# Altium PCB PCB1.PcbDoc
Units mil, origin at the board's own origin, x right, y up, seen from the top; angles counter-clockwise.
Board outline 6000 x 4000 mil, 2 copper layers (Top Layer, Bottom Layer); 20 components, 15 nets, 62 pads, 0 vias.
Unrouted connection lines stored in the file: 43.
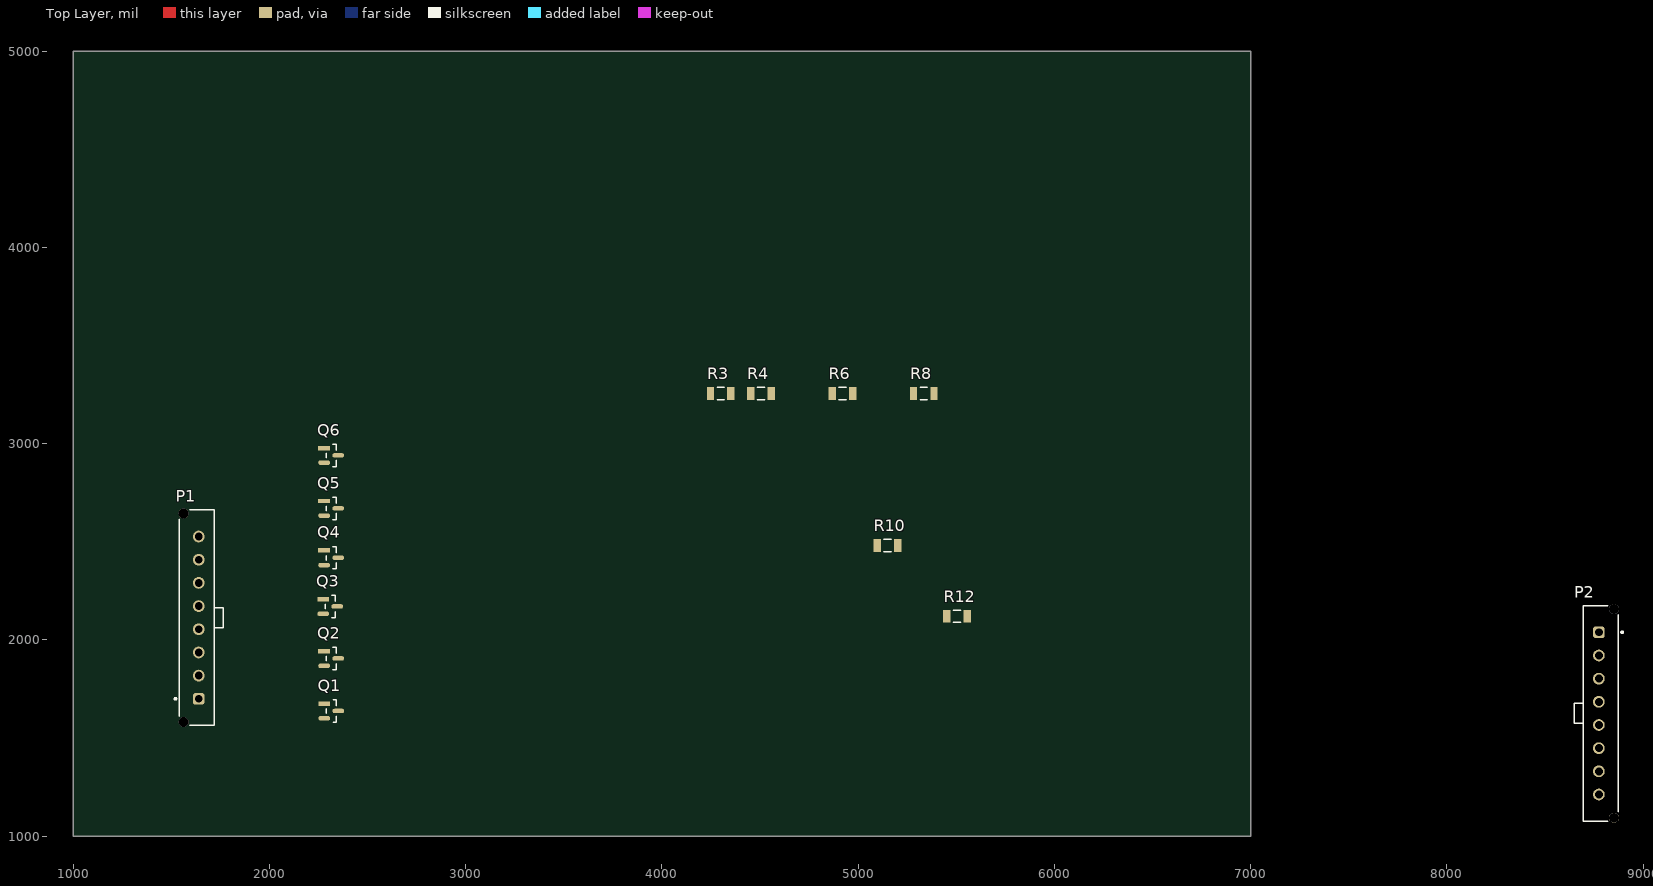
[diagram p0: Top Layer view]
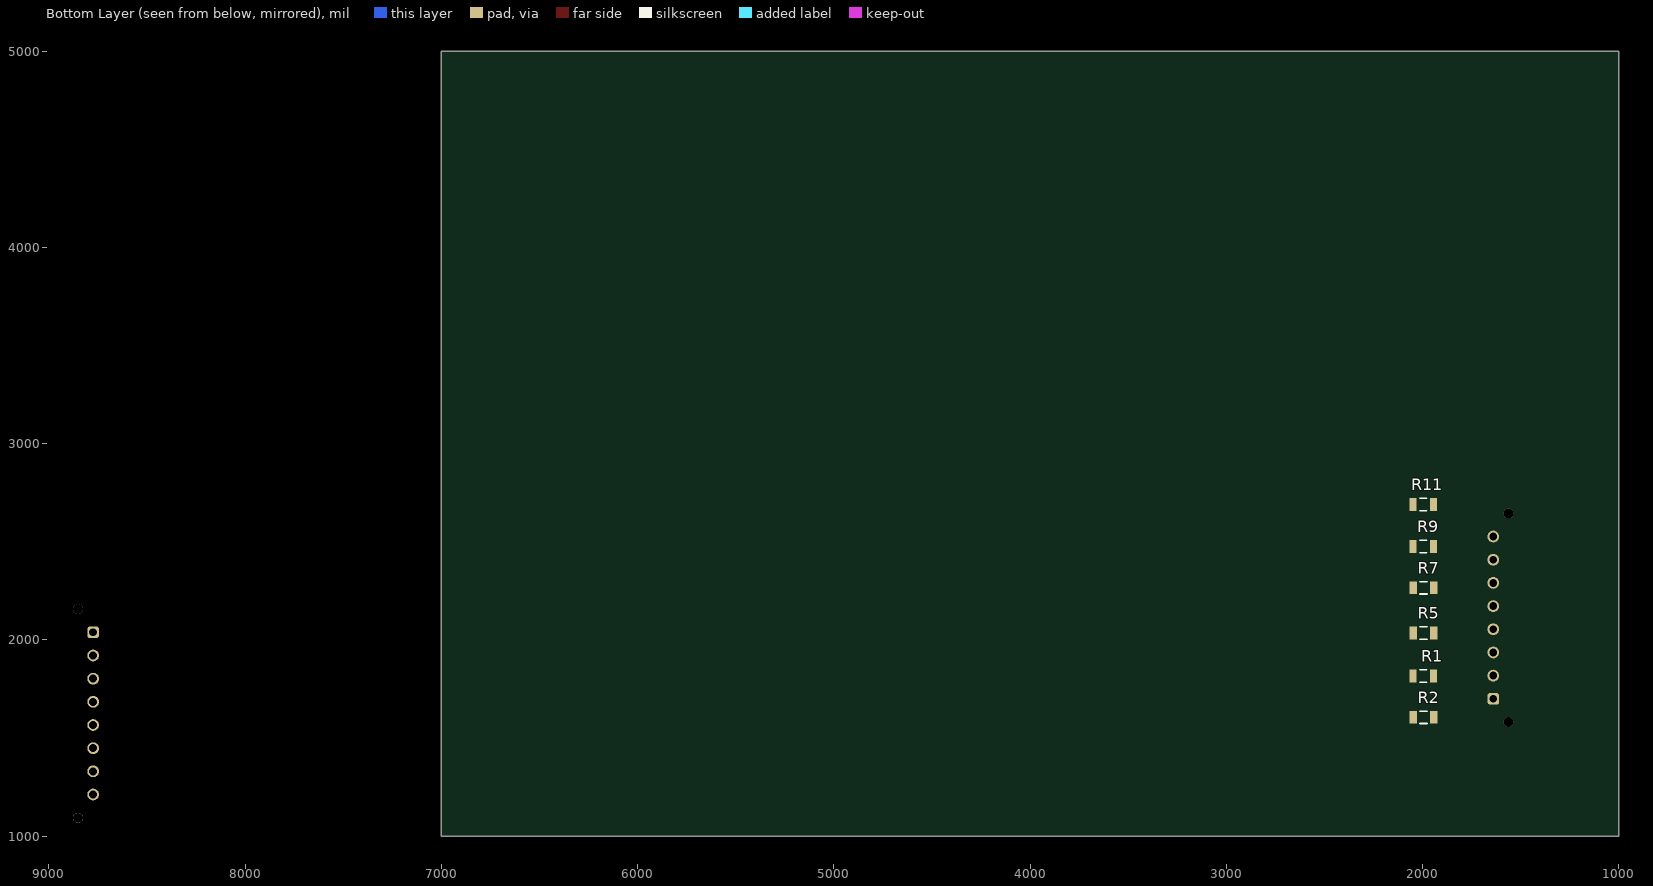
[diagram p1: Bottom Layer view, seen from below]

## Layer stack, top to bottom
Top Solder: solder mask 0.4, Solder Resist, Dk 3.5
Top Layer: signal copper 1.4
Dielectric 1: dielectric 12.6, FR-4, Dk 4.8
Bottom Layer: signal copper 1.4
Bottom Solder: solder mask 0.4, Solder Resist, Dk 3.5

## Board outline
1000,1000 7000,1000 7000,5000 1000,5000

## Design rules (kind name [scope] priority, off if disabled: settings)
Clearance [All] p1: gap=10 ignorepadtopadclearanceinfootprint=FALSE except(0: Arc-Hole Track-Hole SMDPad-Hole THPad-Hole Via-Hole Fill-Hole Poly-Hole Region-Hole Text-Hole)
PolygonConnect [All] p1: connectstyle=Relief reliefconductorwidth=10 reliefentries=4 polygonreliefangle="90 Angle" airgapwidth=10
RoutingVias [All] p1: holewidth=28 width=50 viastyle="Through Hole" minholewidth=28 minwidth=50 maxholewidth=28 maxwidth=50
SolderMaskExpansion [All] p1: expansion=4 istentingtop=FALSE
Width [All] p1: maxlimit=10 minlimit=10 preferedwidth=10
30 further rules are at their usual default settings.

## Components (designator, comment, footprint, x,y, rotation, side; value= is the part's Value field where it differs from the comment)
P1 "LOW_VOLTAGE" 66200811122 1629.96,2112.84 r270 top
P2 "HIGH_VOLTAGE" 66200811122 8785,1625 r90 top
Q1 "BSS138" FP-318-08-IPC_B 2315.83,1637.4 r0 top
Q2 "BSS138" FP-318-08-IPC_B 2315,1905 r0 top
Q3 "BSS138" FP-318-08-IPC_B 2310,2170 r0 top
Q4 "BSS138" FP-318-08-IPC_B 2315,2418.11 r0 top
Q5 "BSS138" FP-318-08-IPC_B 2315,2670 r0 top
Q6 "BSS138" FP-318-08-IPC_B 2315,2940 r0 top
R1 "CRCW120610K0FKEA" FP-CRCW1206-e3-IPC_C 1997.21,1815 r180 bottom
R2 "CRCW120610K0FKEA" FP-CRCW1206-e3-IPC_C 1995,1605 r180 bottom
R3 "CRCW120610K0FKEA" FP-CRCW1206-e3-IPC_C 4300,3255 r0 top
R4 "CRCW120610K0FKEA" FP-CRCW1206-e3-IPC_C 4505,3255 r0 top
R5 "CRCW120610K0FKEA" FP-CRCW1206-e3-IPC_C 1995,2035 r180 bottom
R6 "CRCW120610K0FKEA" FP-CRCW1206-e3-IPC_C 4920,3255 r0 top
R7 "CRCW120610K0FKEA" FP-CRCW1206-e3-IPC_C 1995,2265 r180 bottom
R8 "CRCW120610K0FKEA" FP-CRCW1206-e3-IPC_C 5335,3255 r0 top
R9 "CRCW120610K0FKEA" FP-CRCW1206-e3-IPC_C 1997.21,2475 r180 bottom
R10 "CRCW120610K0FKEA" FP-CRCW1206-e3-IPC_C 5150,2480 r0 top
R11 "CRCW120610K0FKEA" FP-CRCW1206-e3-IPC_C 1997.21,2690 r180 bottom
R12 "CRCW120610K0FKEA" FP-CRCW1206-e3-IPC_C 5505,2120 r0 top

## Footprints (in the part's own frame and the unit in brackets; to place one, negate y for a bottom-side part, rotate by r counter-clockwise, add the part's x,y. Pads: shape width x height; smd on the part's side, far side on the other; paste and mask are expansions set on the pad)
66200811122 [mm] "3.00mm Male Single Row Vertical Header, 8p"
  rrect50% 1.52x1.52 hole 1.02: 1(10.5,0.255)
  round 1.52 hole 1.02: 2(7.5,0.255) 3(4.5,0.255) 4(1.5,0.255) 5(-1.5,0.255) 6(-4.5,0.255) 7(-7.5,0.255) 8(-10.5,0.255)
  round 1.27 hole 1.27 unplated: MH1(-13.5,-1.705) MH2(13.5,-1.705)
  silkscreen extent -13.95,-2.87 13.95,3.46, body extent -13.82,-2.19 13.83,3.38, height 9.93
FP-318-08-IPC_B [mm]
  rect 1.524x0.578 smd paste+0 mask+0: 1(-0.91,0.95)
  rrect100% 1.524x0.578 smd paste+0 mask+0: 2(-0.91,-0.95) 3(0.91,0)
  silkscreen extent -0.65,-1.45 0.65,1.45, body extent -1.92,-1.7 1.92,1.7, height 0.25
FP-CRCW1206-e3-IPC_C [mil]
  rect 37.64x65.28 smd paste+0 mask+0: 1(-52.21,0) 2(52.21,0)
  silkscreen extent -19,-31 19,31, body extent -63,-31 63,31, height 24

## Part data
P1 P2: library part CMP-1502-00446-2, Color=Black, Contact Resistance=10mΩ, Current Rating=5A, Insulation Resistance=1GΩ, Max Operating Temperature=105°C, Min Operating Temperature=-40°C, Operating Supply Voltage=250V, Connector Type="Male Pin, Socket", Contact Material=Copper, Contact Plating=Tin, Fastening Type=Ramp, Gender=Male, Height=11mm, Lead Pitch=3mm, Length=27.65mm, Mount="Through Hole", NexarPartId=23024701, Number of Contacts=8, Number of Pins=8, Number of Positions=8, Number of Rows=1, Orientation=Vertical, Pitch=3mm, REACH SVHC=Unknown, RoHS=Compliant, Termination="Kinked Pin", Width=27.65mm
Q1 Q2 Q3 Q4 Q5 Q6: library part CMP-07173-000101-1, "MOSFET N-CH 50V 220MA SOT-23", Case/Package=SOT-23, Continuous Drain Current (ID)=220mA, Drain to Source Breakdown Voltage=50V, Drain to Source Resistance=3.5R, Gate to Source Voltage (Vgs)=20V, Input Capacitance=27pF, Max Operating Temperature=150°C, Max Power Dissipation=360mW, Min Operating Temperature=-55°C, On-State Resistance=6R, Package Quantity=1, Threshold Voltage=1.3V, Contact Plating=Tin, Current Rating=220mA, Drain to Source Voltage (Vdss)=50V, Dual Supply Voltage=50V, Element Configuration=Single, Fall Time=9ns, Height=0.93mm, Lead Free="Lead Free", Length=2.92mm, Mount="Surface Mount", Nominal Vgs=1.3V, Number of Elements=1, Number of Pins=3, Packaging="Tape and Reel", Power Dissipation=360mW, Radiation Hardening=No, Rds On Max=3.5R, REACH SVHC="No SVHC", Rise Time=9ns, Termination=SMD/SMT, Turn-Off Delay Time=20ns, Turn-On Delay Time=2.5ns, Voltage Rating (DC)=50V, Weight=0.03g, Width=1.3mm
R1 R2 R3 R4 R5 R6 R7 R8 R9 R10 R11 R12: library part CMP-2003-04807-2, "RES Thick Film, 10kΩ, 1%, 0.25W, 100ppm/°C, 1206", Case Code (Imperial)=1206, Case Code (Metric)=3216, Max Operating Temperature=155°C, Max Power Dissipation=250mW, Min Operating Temperature=-55°C, Package Quantity=10, Resistance=10kR, Temperature Coefficient=100ppm/°C, Tolerance=1%, Voltage Rating=200V, Case/Package=1206, Composition="Thick Film", Contact Plating=Tin, Depth=1.6mm, Features="Automotive AEC-Q200", Height=0.55mm, Lead Free="Lead Free", Length=3.2mm, Military Standard=Not, Number of Pins=2, Number of Terminations=2, Packaging="Tape and Reel", Power Rating=250mW, Radiation Hardening=No, Termination=SMD/SMT, Voltage Rating (DC)=200V, Weight=0.000353oz, Width=0.063inch, Working Voltage=200V

## Nets (pads, with @x,y where several pads share a name; then routed paths per layer and width w, separated by ;. In a path a pad name is that pad's centre, name@x,y a point inside that pad or via, vN(x,y) a via of type N, cw(c..) or ccw(c..) an arc to the next point about the centre after c; other vN are vias at no path point)
GND: P1.3 P2.3
HV: P2.4 R3.2 R4.2 R6.2 R8.2 R10.2 R12.2
HV1: P2.1 Q1.3 R3.1
HV2: P2.2 Q2.3 R4.1
HV3: P2.5 Q3.3 R6.1
HV4: P2.6 Q4.3 R8.1
HV5: P2.7 Q5.3 R10.1
HV6: P2.8 Q6.3 R12.1
LV: P1.4 Q1.1 Q2.1 Q3.1 Q4.1 Q5.1 Q6.1 R1.2 R2.2 R5.2 R7.2 R9.2 R11.2
LV1: P1.1 Q1.2 R2.1
LV2: P1.2 Q2.2 R1.1
LV3: P1.5 Q3.2 R5.1
LV4: P1.6 Q4.2 R7.1
LV5: P1.7 Q5.2 R9.1
LV6: P1.8 Q6.2 R11.1
pads on no net: P1.MH1 P1.MH2 P2.MH1 P2.MH2